# Altium PCB PCB CPU.PcbDoc
Units mm, origin at the board's own origin, x right, y up, seen from the top; angles counter-clockwise.
Board outline 25 x 25 mm, 2 copper layers (Top Layer, Bottom Layer), stack 0.325 mm thick; 19 components, 28 nets, 78 pads, 17 vias.
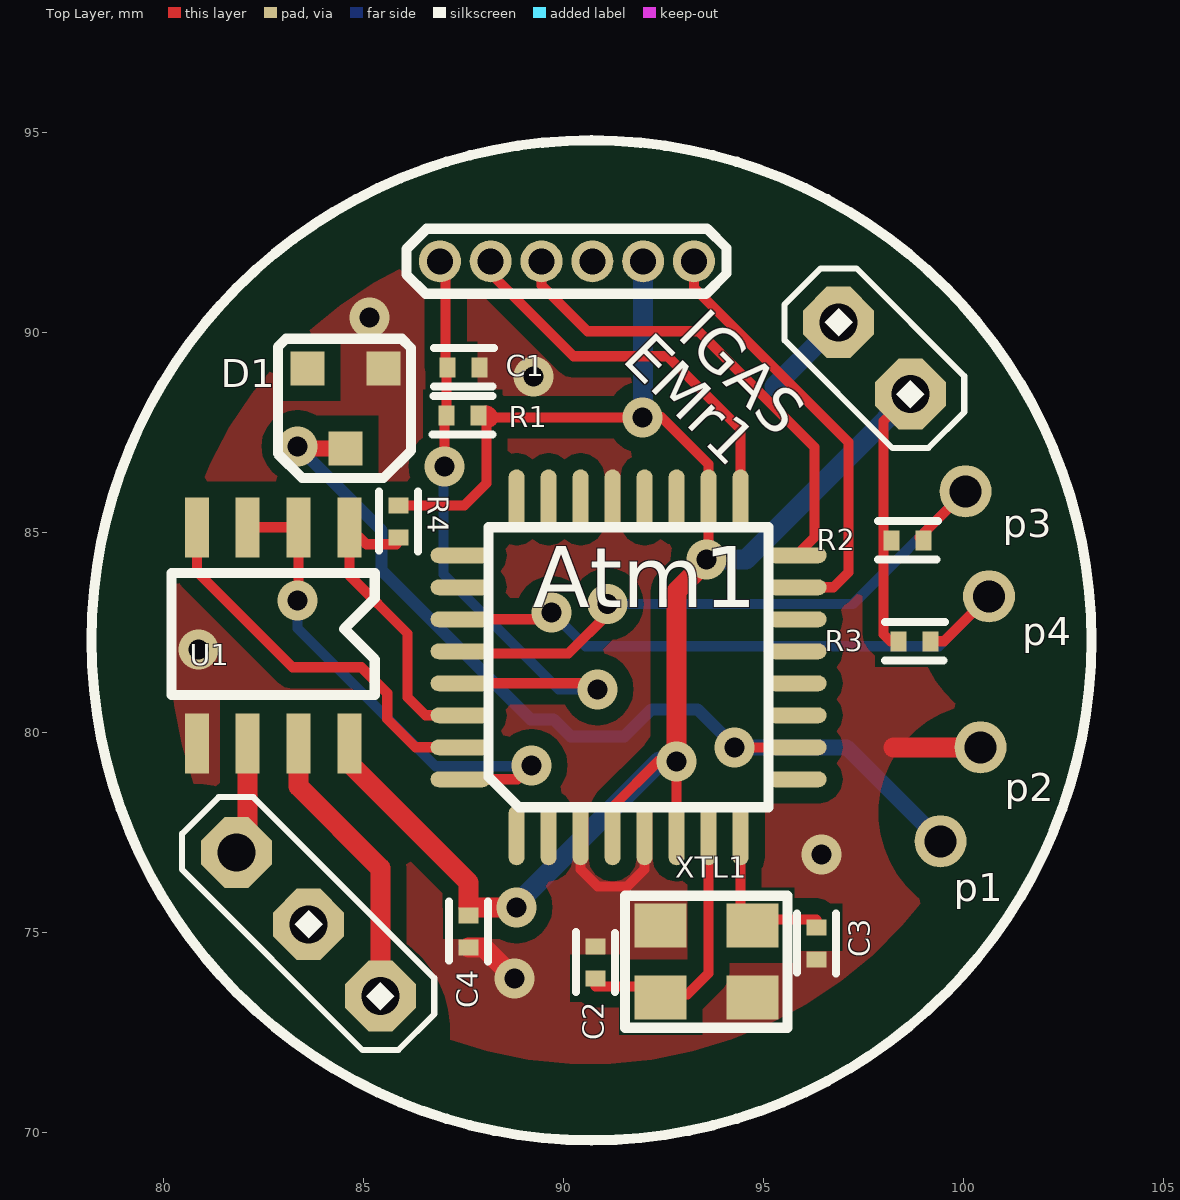
[diagram p0: Top Layer view]
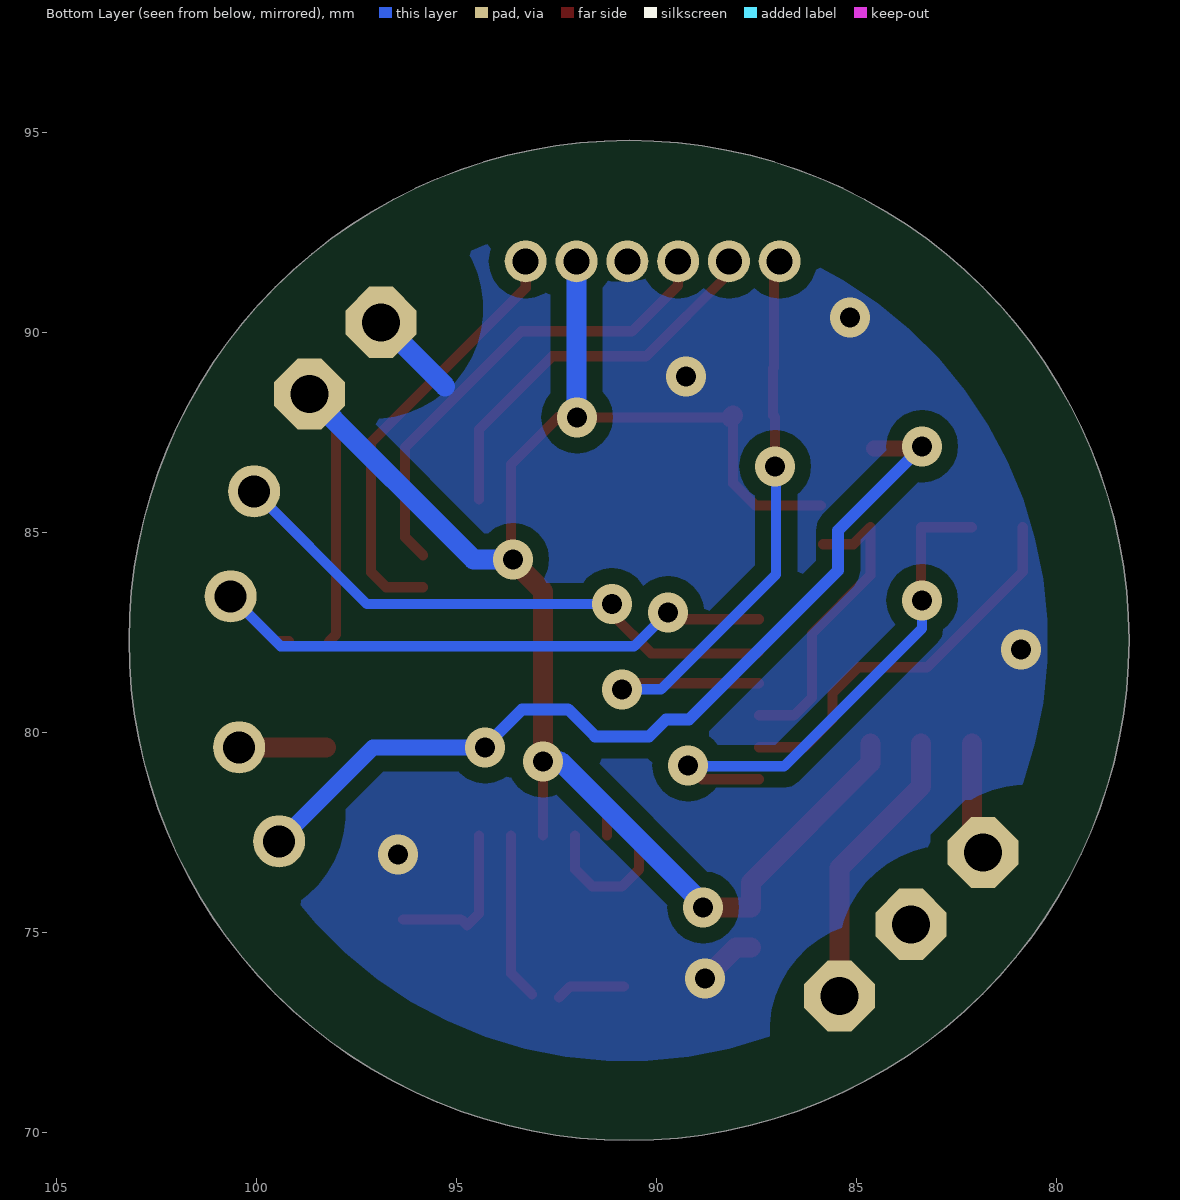
[diagram p1: Bottom Layer view, seen from below]
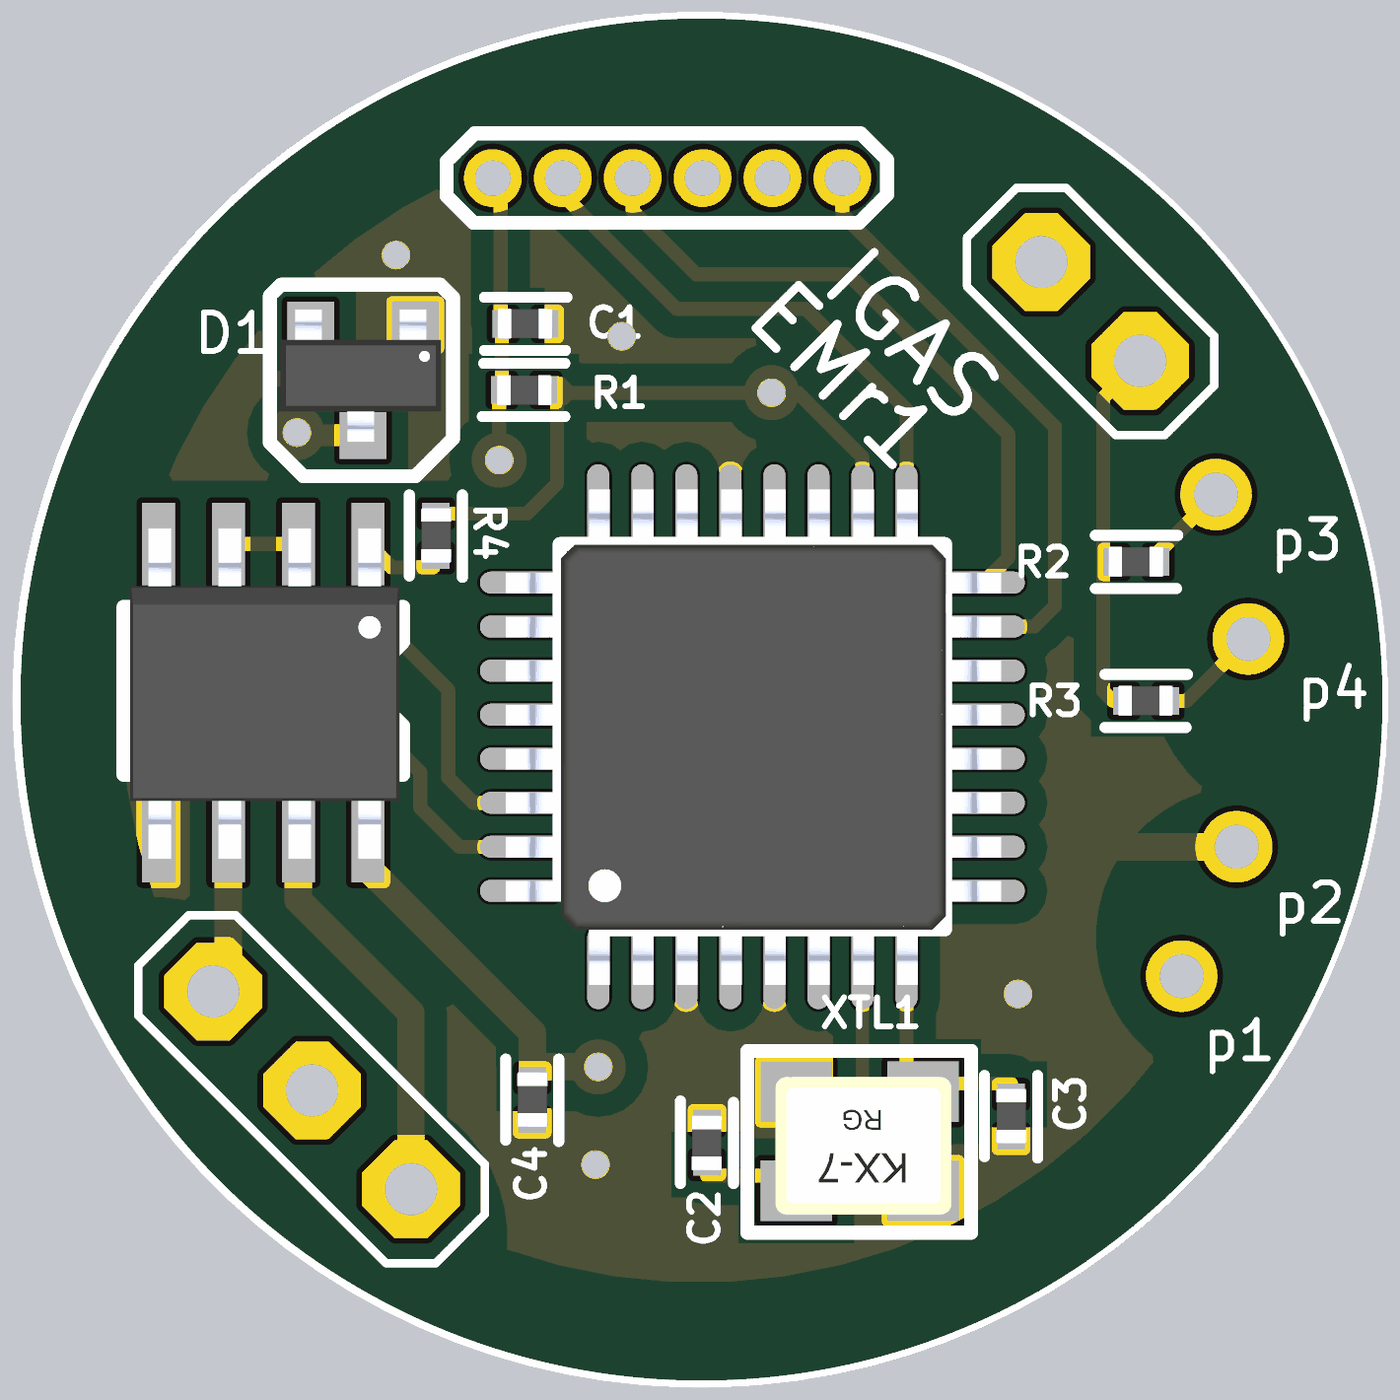
[diagram p2: 3D render of the assembled board from above, using the file's embedded part models]

## Layer stack, top to bottom
Top Solder: solder mask 0.0102, Solder Resist, Dk 3.5
Top Layer: signal copper 0.0356
Dielectric 1: core 0.254, FR-4, Dk 4.2
Bottom Layer: signal copper 0.0356
Bottom Solder: solder mask 0.0102, Solder Resist, Dk 3.5

## Board outline
78.178,82.296 ccw(c90.678,82.296) 90.678,69.796 ccw(c90.678,82.296) 103.178,82.296 ccw(c90.678,82.296) 90.678,94.796 ccw(c90.678,82.296)

## Design rules (kind name [scope] priority, off if disabled: settings)
AssemblyTestPointUsage [All] p1 off:
AssemblyTestpoint [All] p1 off: testpointundercomponent=TRUE minsize=1.016 maxsize=2.54 preferedsize=1.524 minholesize=0 maxholesize=1.016 preferedholesize=0.813 testpointgrid=0.025 usegrid=TRUE gridtolerance=0 allowsidetop=TRUE allowsidebottom=TRUE
Clearance Clearance_1 [All] p1: gap=0.4 ignorepadtopadclearanceinfootprint=TRUE
ComponentClearance [All] p1: gap=0.1 collisioncheckmode=3 verticalgap=0.1 showdistances=FALSE
DiffPairsRouting [All] p1 off: maxlimit=0.254 minlimit=0.254 mostfreqgap=0.254 toplayer_minwidth=0.381 toplayer_maxwidth=0.381 toplayer_prefwidth=0.381 bottomlayer_minwidth=0.381 bottomlayer_maxwidth=0.381 bottomlayer_prefwidth=0.381 maxuncoupledlength=12.7
FabricationTestPointUsage [All] p1 off: valid=0 allowmultiple=FALSE
FabricationTestpoint [All] p1 off: side=3 testpointundercomponent=TRUE minsize=1.016 maxsize=2.54 preferedsize=1.524 minholesize=0 maxholesize=1.016 preferedholesize=0.813 testpointgrid=0.025 allowsidetop=TRUE allowsidebottom=TRUE usegrid=TRUE gridtolerance=0
FanoutControl Fanout_BGA [IsBGA] p1 off: bgadir=Out bgaviamode=Centered fanoutstyle=Auto fanoutdirection=Alternating viagrid=0.025 // Fanout_BGA (Default Rule)
FanoutControl Fanout_LCC [IsLCC] p2 off: bgadir=Out bgaviamode=Centered fanoutstyle=Auto fanoutdirection=Alternating viagrid=0.025 // Fanout_LCC (Default Rule)
FanoutControl Fanout_SOIC [IsSOIC] p3 off: bgadir=Out bgaviamode=Centered fanoutstyle=Auto fanoutdirection=Alternating viagrid=0.025 // Fanout_SOIC (Default Rule)
FanoutControl Fanout_Small [(CompPinCount < 5)] p4 off: bgadir=Out bgaviamode=Centered fanoutstyle=Auto fanoutdirection=OutThenIn viagrid=0.025 // Fanout_Small (Default Rule)
FanoutControl Fanout_Default [All] p5 off: bgadir=Out bgaviamode=Centered fanoutstyle=Auto fanoutdirection=Alternating viagrid=0.025 // Fanout_Default (Default Rule)
Height [All] p1 off: minheight=0 maxheight=25.4 prefheight=12.7
LayerPairs [All] p1 off: enforce=TRUE
MinimumSolderMaskSliver [All] p1 off: minsoldermaskwidth=0.254
NetAntennae [All] p1 off: netantennaetolerance=0
PasteMaskExpansion [All] p1 off: expansion=0
PlaneConnect [All] p1: planeconnectstyle=Direct reliefexpansion=0.508 reliefentries=4 reliefconductorwidth=0.254 reliefairgap=0.254
PolygonConnect [All] p1: connectstyle=Direct reliefconductorwidth=0.5 reliefentries=4 polygonreliefangle="90 Angle" airgapwidth=0.5
RoutingCorners [All] p1 off: cornerstyle=45-Degree minsetback=2.54 maxsetback=2.54
RoutingLayers [All] p1 off: top layer_v5=TRUE bottom layer_v5=TRUE
RoutingPriority [All] p1 off: routingpriority=0
RoutingTopology [All] p1 off: topology=Shortest
RoutingVias [All] p1: holewidth=0.711 width=1.27 viastyle="Through Hole" minholewidth=0.3 minwidth=0.7 maxholewidth=4.711 maxwidth=5.7
SilkToBoardRegionClearance [All] p1 off:
SilkToSilkClearance [All] p1 off: silktosilkclearance=0.254
SilkToSolderMaskClearance [IsPad] p1 off: minsilkscreentomaskgap=0.254 clearancetoexposedcopper=TRUE
SolderMaskExpansion [All] p1 off: expansion=0.102
UnRoutedNet [All] p1: checkbadconnections=TRUE
UnpouredPolygon [All] p1: allowunpoured=TRUE
Width [All] p1: maxlimit=1.8 minlimit=0.22 preferedwidth=0.254
4 further rules are at their usual default settings.

## Classes and differential pairs
component class Processor: Atm1 C1 C2 C3 C4 D1 p1 p2 p3 p4 R1 R2 R3 XTL1
component class RS485: R4 U1

## Components (designator, comment, footprint, x,y, rotation, side; value= is the part's Value field where it differs from the comment)
Atm1 "Atmega328_TQFP" TQFP 88.825,77.425 r0 top
BL1 "Pin1x6" "Pin_6 1,27" 93.26,91.775 r90 top
BL2 "BL?" "2.54 2pin" 98.671,88.454 r45 top
BL4 "BL?" "2.54 3pin" 85.421,73.404 r45 top
C1 "100n" 0402 87.9,89.125 r90 top
C2 "18pf" 0402 90.8,74.65 r180 top
C3 "18pf" 0402 96.325,74.325 r0 top
C4 "100n" 0402 87.625,74.625 r0 top
D1 "zener" Sot23-3 85.5,89.1 r180 top
p1 "Pwr" "Wire Pin 0.5" 99.425,77.275 r0 top
p2 "Gnd" "Wire Pin 0.5" 100.425,79.625 r0 top
p3 "SCL" "Wire Pin 0.5" 100.05,86.025 r0 top
p4 "SDA" "Wire Pin 0.5" 100.637,83.4 r0 top
R1 "10k" 0402 87.075,87.925 r270 top
R2 "10k" 0402 99,84.8 r90 top
R3 "10k" 0402 99.175,82.275 r90 top
R4 "10k" 0402 85.875,84.875 r0 top
U1 "SN65HVD3082EDR" "SOIC 8" 84.645,85.125 r180 top
XTL1 "16.0 MHz" "KX-7 XTAL" 92.425,73.375 r0 top

## Footprints (in the part's own frame and the unit in brackets; to place one, negate y for a bottom-side part, rotate by r counter-clockwise, add the part's x,y. Pads: shape width x height; smd on the part's side, far side on the other; paste and mask are expansions set on the pad)
"2.54 2pin" [mil]
  oct 66x66 hole 37.4: 1(0,0) 2(0,100)
  silkscreen extent -50,-50 50,150
"2.54 3pin" [mil]
  oct 66x66 hole 37.4: 1(0,0) 2(0,100) 3(0,200)
  silkscreen extent -50,-50 50,251
0402 [mm]
  rect 0.5x0.4 smd: 1(0,0)
  rect 0.5x0.4 smd paste+0: 2(0,0.8)
  silkscreen extent -0.48,-0.36 0.48,1.14, body extent -0.27,-0.09 0.28,0.91, height 0.25
"KX-7 XTAL" [mm]
  rect 1.3x1.1 smd: 1(0,0) 2(0,1.8) 2(2.3,0) 3(2.3,1.8)
  silkscreen extent -0.89,-0.76 3.17,2.54, body extent -0.38,-0.43 2.82,2.07, height 0.8
"Pin_6 1,27" [mm]
  round 1.05 hole 0.65: 1(0,0) 2(0,1.27) 3(0,2.54) 4(0,3.81) 5(0,5.08) 6(0,6.35)
  silkscreen extent -0.81,-0.81 0.81,7.19
"SOIC 8" [mm]
  rect 0.6x1.5 smd: 1(0,0) 2(1.27,0) 3(2.54,0) 4(3.81,0) 5(3.81,5.4) 6(2.54,5.4) 7(1.27,5.4) 8(0,5.4)
  silkscreen extent -0.64,1.14 4.44,4.19, body extent -0.57,-0.28 4.33,5.72, height 1.75
Sot23-3 [mm]
  rect 0.85x0.85 smd: 1(0,0) 2(1.9,0) 3(0.95,2)
  silkscreen extent -0.69,-0.74 2.64,2.74, body extent -0.47,-0.29 2.45,2.11, height 1.2
TQFP [mm]
  oval 0.4x1.5 smd mask+0.05: 1(0,0) 2(0.8,0) 3(1.6,0) 4(2.4,0) 5(3.2,0) 6(4,0) 7(4.8,0) 8(5.6,0) 17(5.6,8.4) 18(4.8,8.4) 19(4,8.4) 20(3.2,8.4) 21(2.4,8.4) 22(1.6,8.4) 23(0.8,8.4) 24(0,8.4)
  oval 1.5x0.4 smd mask+0.05: 9(7,1.4) 10(7,2.2) 11(7,3) 12(7,3.8) 13(7,4.6) 14(7,5.4) 15(7,6.2) 16(7,7) 25(-1.4,7) 26(-1.4,6.2) 27(-1.4,5.4) 28(-1.4,4.6) 29(-1.4,3.8) 30(-1.4,3) 31(-1.4,2.2) 32(-1.4,1.4)
  silkscreen extent -0.7,0.7 6.3,7.7, body extent -1.68,-0.31 7.32,8.69, height 1.2
"Wire Pin 0.5" [mm]
  round 1.3 hole 0.8: 1(0,0)

## Part data
BL1: "PLL-6"
BL2: library part "2.54 2pin"
BL4: library part "2.54 3pin"
C1: library part "Capasitor 0805", "C1005X7R1H104K050BB"
C2 C3: library part "Capasitor 0805", "CC0402JRNPO9BN180"
C4: library part "0805 Cap", "C1005X7R1H104K050BB"
D1: library part BZX84, "BZX84C5V6LT1G"
p1 p2 p3 p4: library part PIN_Wire, "pin"
R1 R2 R3 R4: library part "Resistor 0805", "RC0402FR-0710KL"
U1: library part MAX485
XTL1: library part KX-7, "KX-7T 16.0 MHz 50/100/100"

## Via types
v1: diameter 1, hole 0.5, Top Layer to Bottom Layer, tented both sides, 17 vias

## Nets (pads, with @x,y where several pads share a name; then routed paths per layer and width w, separated by ;. In a path a pad name is that pad's centre, name@x,y a point inside that pad or via, vN(x,y) a via of type N, cw(c..) or ccw(c..) an arc to the next point about the centre after c; other vN are vias at no path point)
+5V: Atm1.4 Atm1.6 Atm1.18 BL1.2 BL2.1 C4.2 R1.2 R2.2 R3.2 R4.2 U1.8 | length 52.5
  Top Layer w0.25: R4.2 87.525,85.675 88.075,86.225 88.075,87.925 ; 88.125,87.875 v1(91.975,87.875) ; 98.175,82.275 98,82.45 98,87.783 BL2.1
  Top Layer w0.254: Atm1.4 91.225,78.132 92.368,79.275 v1(92.825,79.275) Atm1.6 ; v1(91.975,87.875) 92.45,87.875 93.625,86.7 Atm1.18 v1@93.625,84.325
  Top Layer w0.5: U1.8 84.645,79.23 87.625,76.25 87.625,75.625 v1@88.8,75.625 ; 88.075,87.925 88.125,87.875 ; v1(92.825,79.275) 92.825,83.525 93.575,84.275 v1(93.575,84.325)
  Bottom Layer w0.5: v1(88.825,75.625) 88.825,75.7 92.4,79.275 v1(92.825,79.275) ; v1(91.975,87.875) 91.99,87.875 BL1.2 ; v1(93.575,84.325) 94.567,84.325 BL2.1@98.546,88.304 ; BL2.1@98.092,87.875 BL2.1
A0: Atm1.23
A1: Atm1.24
A2: Atm1.25
A3: Atm1.26
A6: Atm1.19
A7: Atm1.22
CS_UA1: Atm1.14
D3: Atm1.1
D4: Atm1.2
D7: Atm1.11
GND: Atm1.3 Atm1.5 Atm1.21 BL1.3 BL2.2 C1.1 C2.1 C3.1 C4.1 D1.1 p2.1 U1.5 XTL1.2 | length 9.6
  Top Layer w0.25: Atm1.3 90.425,76.575 90.85,76.15 91.6,76.15 92.025,76.575 Atm1.5
  Top Layer w0.5: C4.1 88,74.625 v1(88.775,73.85) ; 98.25,79.625 p2.1
  Bottom Layer w0.5: 95.275,88.65 BL2.2
  other v1: 96.45,76.95 80.875,82.075 89.25,88.9 85.15,90.375
MISO: Atm1.16 BL1.4 | length 12
  Top Layer w0.254: BL1.4 89.45,91.175 90.6,90.025 93.375,90.025 96.275,87.125 96.275,84.875 Atm1.16
MOSI: Atm1.15 BL1.1 | length 10.8
  Top Layer w0.254: BL1.1 93.26,91.115 97.125,87.25 97.125,84 96.75,83.625 Atm1.15
NetAtm1_7: Atm1.7 C2.2 XTL1.1 | length 5.9
  Top Layer w0.25: 90.8,73.65 92.15,73.65 XTL1.1 ; 93.1,73.45 93.625,73.975 Atm1.7
NetAtm1_8: Atm1.8 C3.2 XTL1.3 | length 4
  Top Layer w0.25: Atm1.8 94.425,75.475 XTL1.3 94.875,75.325 96.325,75.325
NetAtm1_10: Atm1.10 D1.3 p1.1 | length 24.2
  Top Layer w0.25: v1@94.65,79.625 Atm1.10
  Top Layer w0.4: v1@83.5,87.1 D1.3
  Bottom Layer w0.3: v1(83.35,87.15) 85.45,85.05 85.45,84.05 89.175,80.325 89.75,80.325 90.175,79.9 91.525,79.9 92.2,80.575 93.35,80.575 94.288,79.637 94.3,79.625 94.421,79.504 94.275,79.358 v1(94.275,79.625)
  Bottom Layer w0.4: v1(94.275,79.625) 94.3,79.625 97.075,79.625 p1.1
RESET: Atm1.29 BL1.6 C1.2 R1.1 | length 16.6
  Top Layer w0.254: BL1.6 87.05,91.635 87.05,89.125 87.075,89.1 R1.1 87.025,87.875 v1(87.025,86.65) ; Atm1.29 90.7,81.225 v1(90.85,81.075)
  Bottom Layer w0.254: v1@87,86.825 87,83.95 89.875,81.075 v1(90.85,81.075)
RS_A: BL4.3 U1.6 | length 2.8
  Top Layer w0.5: BL4.3 82.105,77.272 U1.6
RS_B: BL4.1 U1.7 | length 7.2
  Top Layer w0.5: U1.7 83.375,78.65 85.421,76.604 BL4.1
RS_Enable: Atm1.32 U1.2 U1.3 | length 13.4
  Top Layer w0.254: U1.3 U1.2 83.375,83.325 v1(83.35,83.3) ; Atm1.32 88.85,78.825 v1(89.2,79.175)
  Bottom Layer w0.254: v1(83.35,83.3) 83.35,82.6 86.8,79.15 89.2,79.15 v1@89.45,79.4
RX: Atm1.30 R4.1 U1.1 | length 7.7
  Top Layer w0.254: R4.1@85.825,84.7 85.07,84.7 U1.1 84.645,83.925 86.1,82.47 86.1,80.875 86.55,80.425 Atm1.30
RX1: Atm1.12
SCK: Atm1.17 BL1.5 | length 9.9
  Top Layer w0.254: BL1.5 88.18,91.47 90.25,89.4 92.6,89.4 94.425,87.575 Atm1.17
SCL_: Atm1.28 p3.1 R2.1 | length 16.1
  Top Layer w0.254: Atm1.28 87.477,81.973 90.125,81.973 91.104,82.952 v1(91.104,83.204) ; R2.1@98.9,84.875 p3.1
  Bottom Layer w0.254: v1(91.104,83.204) 97.229,83.204 p3.1
SDA: Atm1.27 p4.1 R3.1 | length 16.1
  Top Layer w0.254: Atm1.27 89.525,82.825 v1(89.7,83) ; R3.1 99.512,82.275 p4.1
  Bottom Layer w0.254: v1(89.7,83) 90.55,82.15 99.387,82.15 p4.1
TX: Atm1.31 U1.4 | length 9.9
  Top Layer w0.254: U1.4 80.835,84.015 83.225,81.625 84.942,81.625 85.592,80.975 85.592,80.333 86.3,79.625 Atm1.31
TX1: Atm1.13
pads on no net: Atm1.9 Atm1.20 BL4.2 D1.2

## Polygon pours and split planes (outlines as drawn)
GND on Bottom Layer "Top Layer-No Net" (solid, remove dead copper, pour order 12): 90.727,71.786 cw(c90.727,82.286) 80.227,82.286 cw(c90.727,82.286) 90.727,92.786 cw(c90.727,82.286) 101.227,82.286 cw(c90.727,82.286)
GND on Top Layer "Top Layer-No Net" (solid, remove dead copper, pour order 8): 90.666,71.718 cw(c90.666,82.218) 80.166,82.218 cw(c90.666,82.218) 90.666,92.718 cw(c90.666,82.218) 101.166,82.218 cw(c90.666,82.218)

## Other copper
Top Layer:
  pour cut-out: 88.178,94.044 ccw(c90.928,94.044) 90.928,91.294 ccw(c90.928,94.044) 93.678,94.044 ccw(c90.928,94.044) 90.928,96.794 ccw(c90.928,94.044)
  pour cut-out: 97.874,77.984 ccw(c100.624,77.984) 100.624,75.234 ccw(c100.624,77.984) 103.374,77.984 ccw(c100.624,77.984) 100.624,80.734 ccw(c100.624,77.984)
  pour cut-out: 98.794,86.513 ccw(c101.544,86.513) 101.544,83.763 ccw(c101.544,86.513) 104.294,86.513 ccw(c101.544,86.513) 101.544,89.263 ccw(c101.544,86.513)
  pour cut-out: 96.743,89.35 ccw(c99.493,89.35) 99.493,86.6 ccw(c99.493,89.35) 102.243,89.35 ccw(c99.493,89.35) 99.493,92.1 ccw(c99.493,89.35)
  pour cut-out: 81.669,72.522 ccw(c84.419,72.522) 84.419,69.772 ccw(c84.419,72.522) 87.169,72.522 ccw(c84.419,72.522) 84.419,75.272 ccw(c84.419,72.522)
  pour cut-out: 79.947,74.367 ccw(c82.697,74.367) 82.697,71.617 ccw(c82.697,74.367) 85.447,74.367 ccw(c82.697,74.367) 82.697,77.117 ccw(c82.697,74.367)
  pour cut-out: 77.985,75.961 ccw(c80.735,75.961) 80.735,73.211 ccw(c80.735,75.961) 83.485,75.961 ccw(c80.735,75.961) 80.735,78.711 ccw(c80.735,75.961)
  pour cut-out: 98.84,82.814 ccw(c101.59,82.814) 101.59,80.064 ccw(c101.59,82.814) 104.34,82.814 ccw(c101.59,82.814) 101.59,85.564 ccw(c101.59,82.814)
  pour cut-out: 94.406,90.628 ccw(c97.156,90.628) 97.156,87.878 ccw(c97.156,90.628) 99.906,90.628 ccw(c97.156,90.628) 97.156,93.378 ccw(c97.156,90.628)
Bottom Layer:
  pour cut-out: 88.149,94.016 ccw(c90.899,94.016) 90.899,91.266 ccw(c90.899,94.016) 93.649,94.016 ccw(c90.899,94.016) 90.899,96.766 ccw(c90.899,94.016)
  pour cut-out: 97.759,78.006 ccw(c100.509,78.006) 100.509,75.256 ccw(c100.509,78.006) 103.259,78.006 ccw(c100.509,78.006) 100.509,80.756 ccw(c100.509,78.006)
  pour cut-out: 98.694,86.538 ccw(c101.444,86.538) 101.444,83.788 ccw(c101.444,86.538) 104.194,86.538 ccw(c101.444,86.538) 101.444,89.288 ccw(c101.444,86.538)
  pour cut-out: 96.559,89.219 ccw(c99.309,89.219) 99.309,86.469 ccw(c99.309,89.219) 102.059,89.219 ccw(c99.309,89.219) 99.309,91.969 ccw(c99.309,89.219)
  pour cut-out: 81.665,72.525 ccw(c84.415,72.525) 84.415,69.775 ccw(c84.415,72.525) 87.165,72.525 ccw(c84.415,72.525) 84.415,75.275 ccw(c84.415,72.525)
  pour cut-out: 79.947,74.417 ccw(c82.697,74.417) 82.697,71.667 ccw(c82.697,74.417) 85.447,74.417 ccw(c82.697,74.417) 82.697,77.167 ccw(c82.697,74.417)
  pour cut-out: 77.975,75.94 ccw(c80.725,75.94) 80.725,73.19 ccw(c80.725,75.94) 83.475,75.94 ccw(c80.725,75.94) 80.725,78.69 ccw(c80.725,75.94)
  pour cut-out: 98.709,82.619 ccw(c101.459,82.619) 101.459,79.869 ccw(c101.459,82.619) 104.209,82.619 ccw(c101.459,82.619) 101.459,85.369 ccw(c101.459,82.619)
  pour cut-out: 94.325,90.593 ccw(c97.075,90.593) 97.075,87.843 ccw(c97.075,90.593) 99.825,90.593 ccw(c97.075,90.593) 97.075,93.343 ccw(c97.075,90.593)

## Silkscreen, mask and mechanical layers (free items; w line width, h text height)
Top Overlay:
  circle w0.254: c90.7,82.3 r12.5
  text "IGAS" at 92.8,89.9 h1.1 r315
  text "EMr1" at 91.425,89.3 h1.1 r315
Mechanical 13:
  circle w0.254: c90.75,82.325 r12.5